# Altium PCB AuxBoard030610.PcbDoc
Units mm, origin at the board's own origin, x right, y up, seen from the top; angles counter-clockwise.
Board outline 193.93 x 90.42 mm, 2 copper layers (Top Layer, Bottom Layer); 177 components, 142 nets, 489 pads, 90 vias.
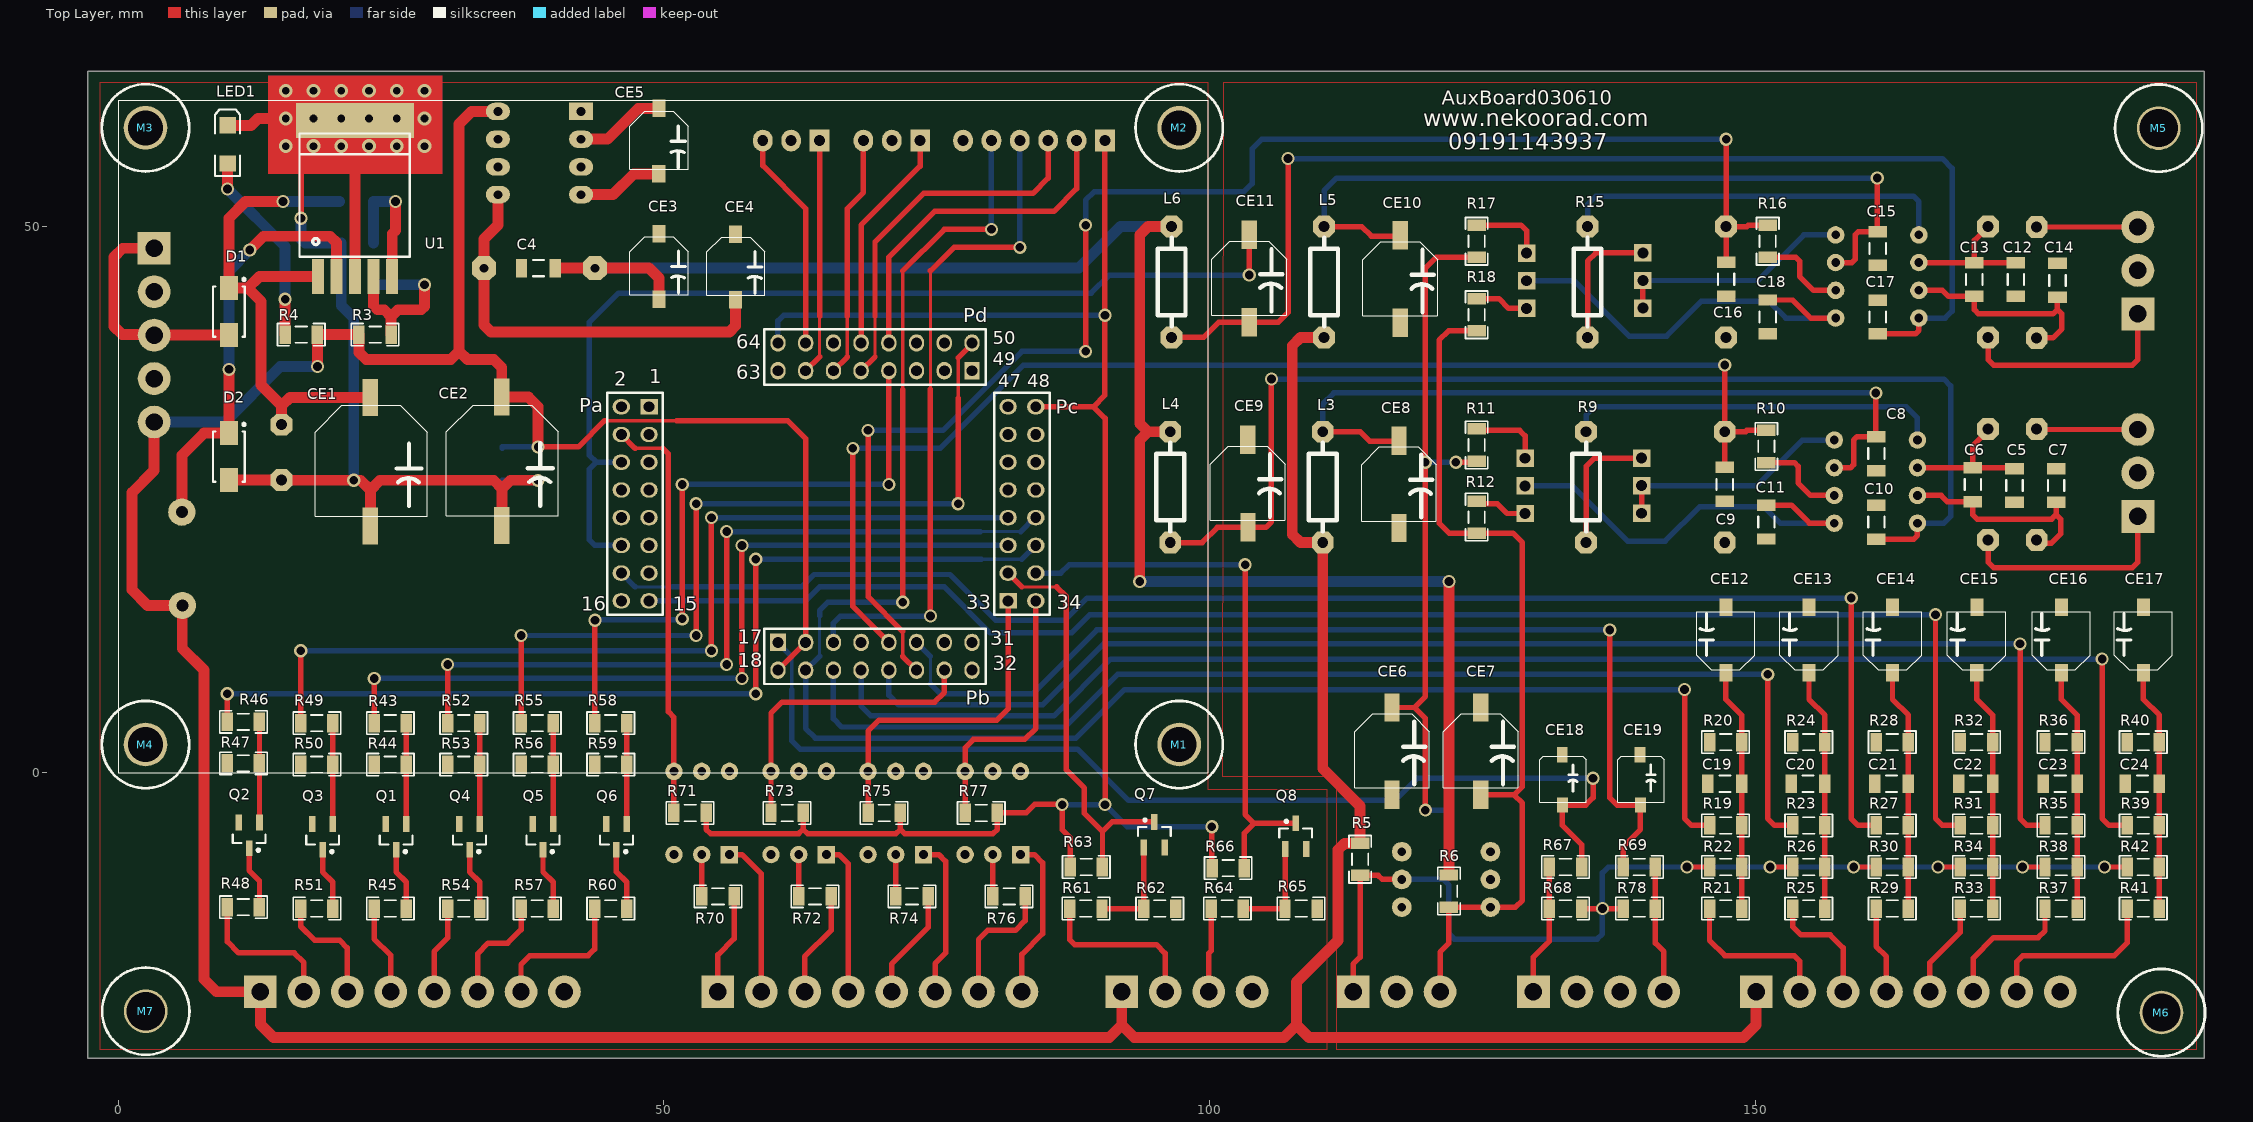
[diagram p0: Top Layer view]
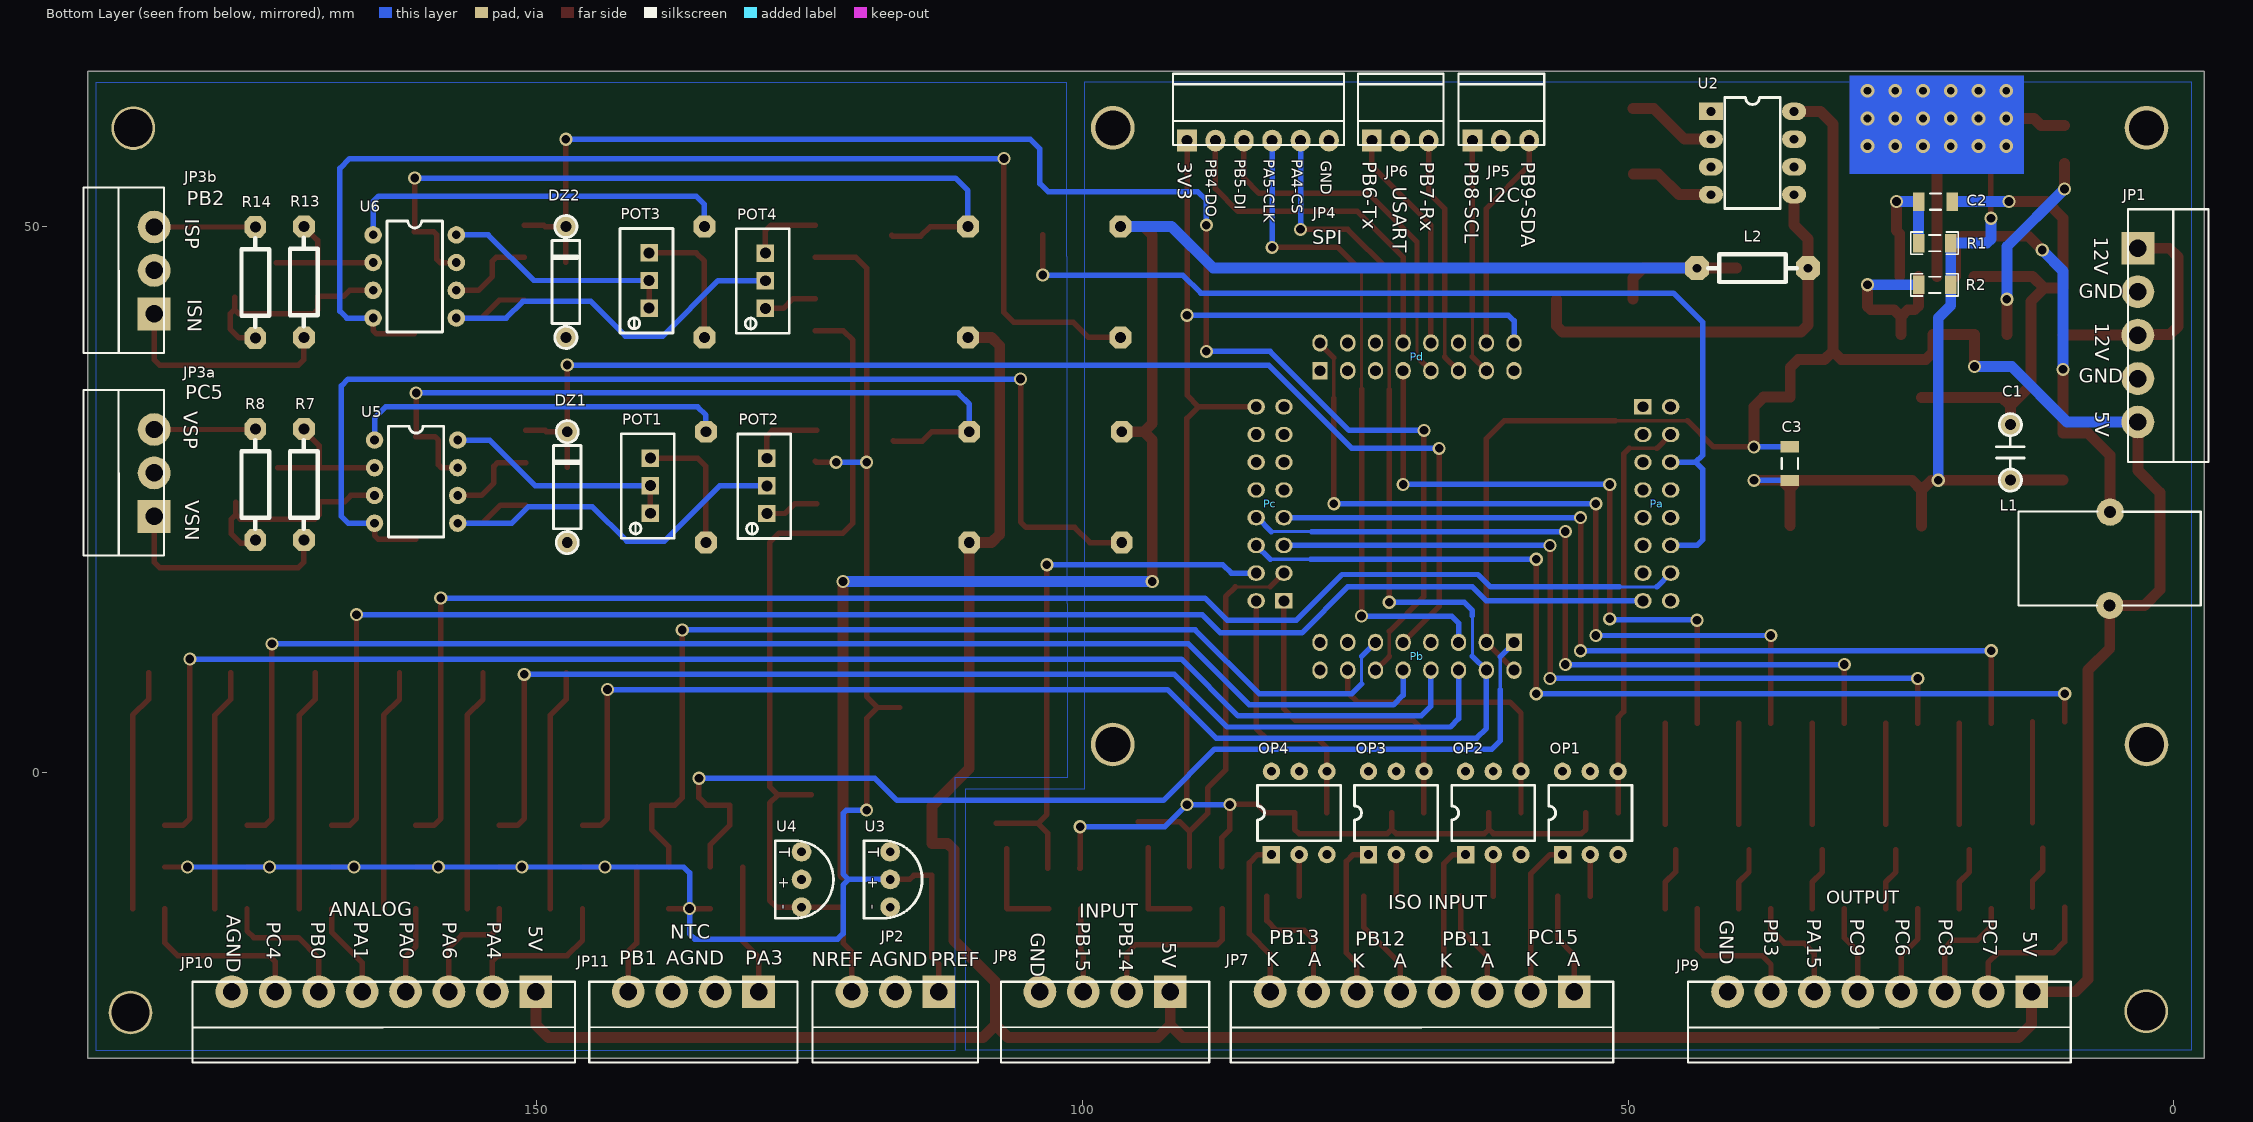
[diagram p1: Bottom Layer view, seen from below]
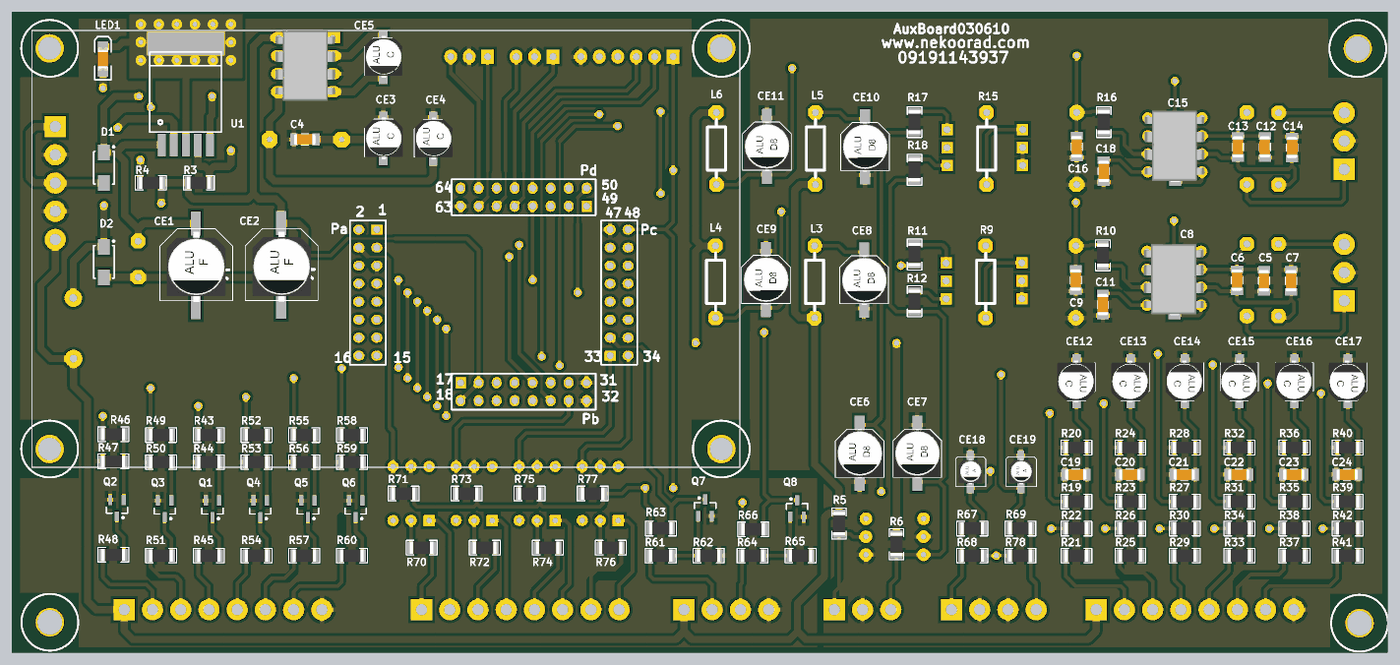
[diagram p2: 3D render of the assembled board from above, using the file's embedded part models]

## Layer stack, top to bottom
Top Solder: solder mask 0.0102, Solder Resist, Dk 3.5
Top Layer: signal copper 0.0356
Dielectric 1: dielectric 0.32, FR-4, Dk 4.8
Bottom Layer: signal copper 0.0356
Bottom Solder: solder mask 0.0102, Solder Resist, Dk 3.5

## Board outline
-2.794,-26.162 -2.794,64.262 191.135,64.262 191.135,-26.162

## Design rules (kind name [scope] priority, off if disabled: settings)
Clearance Clearance_2 [InNamedPolygon('Bottom Layer-GND')] p1: gap=0.254 ignorepadtopadclearanceinfootprint=FALSE except(0: Arc-Hole Track-Hole SMDPad-Hole THPad-Hole Via-Hole Fill-Hole Poly-Hole Region-Hole Text-Hole)
Clearance Clearance_1 [InNamedPolygon('Bottom Layer-GND')] p2: gap=0.254 ignorepadtopadclearanceinfootprint=FALSE except(0: Arc-Hole Track-Hole SMDPad-Hole THPad-Hole Via-Hole Fill-Hole Poly-Hole Region-Hole Text-Hole)
Clearance [All] p3: gap=0.4 ignorepadtopadclearanceinfootprint=FALSE
PlaneClearance [All] p1: clearance=0.5
PlaneConnect [All] p1: planeconnectstyle=Relief reliefexpansion=0.508 reliefentries=4 reliefconductorwidth=0.6 reliefairgap=0.5
PolygonConnect [All] p1: connectstyle=Relief reliefconductorwidth=0.6 reliefentries=4 polygonreliefangle="90 Angle" airgapwidth=0.5
RoutingVias [All] p1: holewidth=0.711 width=1.27 viastyle="Through Hole" minholewidth=0.711 minwidth=1.27 maxholewidth=0.711 maxwidth=1.27
SolderMaskExpansion [All] p1: expansion=0.102 istentingtop=FALSE
Width [All] p1: maxlimit=1 minlimit=0.2 preferedwidth=0.5 minimp=50.000000 maximp=50.000000 favimp=50.000000
28 further rules are at their usual default settings.

## Components (designator, comment, footprint, x,y, rotation, side; value= is the part's Value field where it differs from the comment)
C1 "100N" C2P 14.986,31.886 r270 bottom
C2 "100N" SMD_CAP_1206. 21.848,52.324 r0 bottom
C3 "100N" SMD_CAP_1206. 35.179,28.321 r270 bottom
C4 "100N" SMD_CAP_1206. 38.506,46.228 r180 top
C5 "1N" SMD_CAP_1206. 173.736,26.314 r270 top
C6 "10N" SMD_CAP_1206. 169.926,26.391 r270 top
C7 "1N" SMD_CAP_1206. 177.546,26.314 r90 top
C8 "100N" SMD_CAP_1206. 161.089,29.234 r90 top
C9 "100N" SMD_CAP_1206. 147.193,26.416 r270 top
C10 "100N" SMD_CAP_1206. 161.089,22.96 r90 top
C11 "100N" SMD_CAP_1206. 151.003,22.962 r270 top
C12 "1N" SMD_CAP_1206. 173.863,45.187 r270 top
C13 "10N" SMD_CAP_1206. 170.053,45.187 r270 top
C14 "1N" SMD_CAP_1206. 177.673,45.11 r90 top
C15 "100N" SMD_CAP_1206. 161.216,48.03 r90 top
C16 "100N" SMD_CAP_1206. 147.32,45.212 r270 top
C17 "100N" SMD_CAP_1206. 161.216,41.756 r90 top
C18 "100N" SMD_CAP_1206. 151.13,41.758 r270 top
C19 "10N" SMD_CAP_1206. 147.197,-1.016 r180 top
C20 "10N" SMD_CAP_1206. 154.817,-1.016 r180 top
C21 "10N" SMD_CAP_1206. 162.466,-1.016 r180 top
C22 "10N" SMD_CAP_1206. 170.184,-1.016 r180 top
C23 "10N" SMD_CAP_1206. 177.931,-1.016 r180 top
C24 "10N" SMD_CAP_1206. 185.453,-1.016 r180 top
CE1 "470M/25" CAP-E-6 23.274,24.856 r0 top
CE2 "1000M/16" CAP-E-6 35.306,24.892 r0 top
CE3 "10M/25" CAP-E-3 49.62,44.489 r0 top
CE4 "10M/25" CAP-E-3 56.642,44.45 r0 top
CE5 "10M/25" CAP-E-3 49.605,55.964 r0 top
CE6 "47M" CAP-E-4 116.713,-0.322 r0 top
CE7 "47M" CAP-E-4 124.841,-0.322 r0 top
CE8 "47M" CAP-E-4 117.348,24.13 r0 top
CE9 "47M" CAP-E-4 103.505,24.189 r0 top
CE10 "47M" CAP-E-4 117.475,42.926 r0 top
CE11 "47M" CAP-E-4 103.632,42.985 r0 top
CE12 "10M" CAP-E-3 147.226,14.044 r180 top
CE13 "10M" CAP-E-3 154.846,14.044 r180 top
CE14 "10M" CAP-E-3 162.495,14.044 r180 top
CE15 "10M" CAP-E-3 170.213,14.044 r180 top
CE16 "10M" CAP-E-3 177.96,14.044 r180 top
CE17 "10M" CAP-E-3 185.482,14.044 r180 top
CE18 "1M" CAP-E-2 132.395,-1.739 r0 top
CE19 "1M" CAP-E-2 139.536,-1.739 r0 top
D1 "schottky" SMA-M 10.16,42.241 r270 top
D2 "schottky" SMA-M 10.16,28.956 r270 top
DZ1 "Z" D4P 147.193,21.082 r270 bottom
DZ2 "Z" D4P 147.32,39.878 r270 bottom
JP1 "DC_SUP" "dsip 5 right" 3.302,40.091 r180 bottom
JP2 "Ref" "dsip 3 right" 121.158,-20.066 r270 bottom
JP3a "V/A Signal" "dsip 3 right" 185.039,31.496 r0 bottom
JP3b "V/A Signal" "dsip 3 right" 185.039,50.048 r0 bottom
JP4 "SPI" "SIP 6 Right" 90.41,57.912 r270 bottom
JP5 "I2C" "SIP 3 Right" 64.313,57.785 r270 bottom
JP6 "UART" "SIP 3 Right" 73.533,57.785 r270 bottom
JP7 "ISO DIN" "dsip 8 right" 54.969,-20.091 r270 bottom
JP8 "DIN" "dsip 4 right" 99.933,-20.066 r270 bottom
JP9 "DOUT" "dsip 8 right" 13.059,-20.091 r270 bottom
JP10 "Analog" "dsip 8 right" 150.092,-20.091 r270 bottom
JP11 "NTC" "dsip 4 right" 137.65,-20.066 r270 bottom
L1 "100UH" INDUCTOR-ylw -2.393,23.731 r0 bottom
L2 "100UH" r4p#1 33.528,46.228 r270 bottom
L3 "100UH" r4p#2 110.363,21.082 r180 top
L4 "100UH" r4p#2 96.393,31.242 r0 top
L5 "100UH" r4p#2 110.49,39.878 r180 top
L6 "100UH" r4p#2 96.52,50.038 r0 top
LED1 "Red" LED_SMD_1206 12.254,57.653 r90 top
M1 "Comment" Stud-hole#1 97.212,2.583 r0 top locked value=DNP/MH
M2 "Comment" Stud-hole#1 97.212,59.083 r0 top locked value=DNP/MH
M3 "Comment" Stud-hole#1 2.512,59.083 r0 top locked value=DNP/MH
M4 "Comment" Stud-hole#1 2.512,2.583 r0 top locked value=DNP/MH
M5 "Comment" Stud-hole#2 186.944,59.055 r0 top value=DNP/MH
M6 "Comment" Stud-hole#2 187.198,-21.971 r0 top value=DNP/MH
M7 "Comment" Stud-hole#2 2.54,-21.844 r0 top value=DNP/MH
OP1 "4N28" DIP6 56.007,-7.493 r90 bottom
OP2 "4N28" DIP6 64.897,-7.493 r90 bottom
OP3 "4N28" DIP6 73.787,-7.493 r90 bottom
OP4 "4N28" DIP6 82.677,-7.493 r90 bottom
Pa "Header 8X2" HDR2X8#1 48.641,33.528 r270 bottom locked
Pb "Header 8X2" HDR2X8#2 60.452,11.938 r0 bottom locked
Pc "Header 8X2" HDR2X8#1 81.534,15.748 r90 bottom locked
Pd "Header 8X2" HDR2X8#1 78.232,36.83 r180 bottom locked
POT1 "XX" "pot multi turn" 139.573,23.769 r180 bottom
POT2 "10K" "pot multi turn" 128.905,23.749 r180 bottom
POT3 "XX" "pot multi turn" 139.7,42.565 r180 bottom
POT4 "10K" "pot multi turn" 129.032,42.545 r180 bottom
Q1 "2N2222" 2N2222 25.566,-4.174 r180 top
Q2 "2N2222" 2N2222 12.104,-4.047 r180 top
Q3 "2N2222" 2N2222 18.835,-4.174 r180 top
Q4 "2N2222" 2N2222 32.297,-4.174 r180 top
Q5 "2N2222" 2N2222 39.028,-4.174 r180 top
Q6 "2N2222" 2N2222 45.759,-4.174 r180 top
Q7 "2N2222" 2N2222 94.83,-7.383 r0 top
Q8 "2N2222" 2N2222 107.784,-7.51 r0 top
R1 "10K%" RES_1206 21.886,47.633 r180 bottom
R2 "2K2%" RES_1206 21.886,43.823 r180 bottom
R3 "47K%" RES_1206 23.58,39.251 r0 top
R4 "4K7%" RES_1206 16.748,41.013 r180 top
R5 "270R" RES_1206 114.673,-7.887 r90 top
R6 "270R" RES_1206 122.801,-10.808 r90 top
R7 "5K%" R4P 171.323,21.336 r0 bottom
R8 "5K%" R4P 175.768,31.496 r180 bottom
R9 "XX" R4P 134.493,31.242 r0 top
R10 "1K%" RES_1206 150.122,29.858 r270 top
R11 "XX" RES_1206 125.341,30.057 r90 top
R12 "XX" RES_1206 123.579,23.381 r270 top
R13 "5K%" R4P 171.323,39.878 r0 bottom
R14 "5K%" R4P 175.768,49.997 r180 bottom
R15 "XX" R4P 134.62,50.038 r0 top
R16 "1K%" RES_1206 150.249,48.654 r270 top
R17 "XX" RES_1206 125.341,48.726 r90 top
R18 "XX" RES_1206 123.579,41.923 r270 top
R19 "1K%" RES_1206 147.307,-5.707 r0 top
R20 "ND" RES_1206 147.307,1.913 r0 top
R21 "1K%" RES_1206 147.235,-11.565 r180 top
R22 "ND" RES_1206 147.307,-9.517 r0 top
R23 "1K%" RES_1206 154.927,-5.707 r0 top
R24 "ND" RES_1206 154.927,1.913 r0 top
R25 "1K%" RES_1206 154.855,-11.565 r180 top
R26 "ND" RES_1206 154.927,-9.517 r0 top
R27 "1K%" RES_1206 162.576,-5.707 r0 top
R28 "ND" RES_1206 162.576,1.913 r0 top
R29 "1K%" RES_1206 162.504,-11.565 r180 top
R30 "ND" RES_1206 162.576,-9.517 r0 top
R31 "1K%" RES_1206 170.294,-5.707 r0 top
R32 "ND" RES_1206 170.294,1.913 r0 top
R33 "1K%" RES_1206 170.222,-11.565 r180 top
R34 "ND" RES_1206 170.294,-9.517 r0 top
R35 "1K%" RES_1206 178.041,-5.707 r0 top
R36 "ND" RES_1206 178.041,1.913 r0 top
R37 "1K%" RES_1206 177.969,-11.565 r180 top
R38 "ND" RES_1206 178.041,-9.517 r0 top
R39 "1K%" RES_1206 185.563,-5.707 r0 top
R40 "ND" RES_1206 185.563,1.913 r0 top
R41 "1K%" RES_1206 185.491,-11.565 r180 top
R42 "ND" RES_1206 185.563,-9.517 r0 top
R43 "10K" RES_1206 24.977,3.662 r0 top
R44 "4K7" RES_1206 24.905,1.614 r180 top
R45 "ND" RES_1206 24.905,-11.565 r180 top
R46 "10K" RES_1206 11.515,3.789 r0 top
R47 "4K7" RES_1206 11.443,1.741 r180 top
R48 "ND" RES_1206 11.443,-11.438 r180 top
R49 "10K" RES_1206 18.246,3.662 r0 top
R50 "4K7" RES_1206 18.174,1.614 r180 top
R51 "ND" RES_1206 18.174,-11.565 r180 top
R52 "10K" RES_1206 31.708,3.662 r0 top
R53 "4K7" RES_1206 31.636,1.614 r180 top
R54 "ND" RES_1206 31.636,-11.565 r180 top
R55 "10K" RES_1206 38.439,3.662 r0 top
R56 "4K7" RES_1206 38.367,1.614 r180 top
R57 "ND" RES_1206 38.367,-11.565 r180 top
R58 "10K" RES_1206 45.17,3.662 r0 top
R59 "4K7" RES_1206 45.098,1.614 r180 top
R60 "ND" RES_1206 45.098,-11.565 r180 top
R61 "10K" RES_1206 88.702,-13.327 r0 top
R62 "4K7" RES_1206 95.462,-13.327 r0 top
R63 "10K" RES_1206 88.731,-9.517 r0 top
R64 "10K" RES_1206 101.656,-13.327 r0 top
R65 "4K7" RES_1206 108.416,-13.327 r0 top
R66 "10K" RES_1206 101.735,-9.63 r0 top
R67 "10K" RES_1206 132.644,-9.517 r0 top
R68 "5K" RES_1206 132.572,-11.565 r180 top
R69 "10K" RES_1206 139.332,-7.755 r180 top
R70 "1K%" RES_1206 54.92,-10.436 r180 top
R71 "10K%" RES_1206 52.438,-4.564 r0 top
R72 "1K%" RES_1206 63.81,-10.436 r180 top
R73 "10K%" RES_1206 61.328,-4.564 r0 top
R74 "1K%" RES_1206 72.7,-10.436 r180 top
R75 "10K%" RES_1206 70.218,-4.564 r0 top
R76 "1K%" RES_1206 81.59,-10.436 r180 top
R77 "10K%" RES_1206 79.108,-4.564 r0 top
R78 "5K" RES_1206 139.404,-13.327 r0 top
U1 "LM2576T-ADJ" D2PACK_TO263-5 21.717,50.165 r0 top
U2 "ICL7662" DIP8#1 42.418,60.579 r180 bottom
U3 "LM336-2V5" lm336 117.602,-12.319 r180 bottom
U4 "LM336-2V5" lm336 125.73,-12.319 r180 bottom
U5 "AD620" DIP8#2 164.846,30.48 r180 bottom
U6 "AD620" DIP8#2 164.973,49.276 r180 bottom

## Footprints (in the part's own frame and the unit in brackets; to place one, negate y for a bottom-side part, rotate by r counter-clockwise, add the part's x,y. Pads: shape width x height; smd on the part's side, far side on the other; paste and mask are expansions set on the pad)
2N2222 [mm] "SOT_23"
  rect 0.6x1.45 smd: 1(-0.85,0.525) 2(1.05,0.525) 3(0.1,2.875)
  silkscreen extent -1.4,1.6 1.6,3.17, body extent -1.4,1 1.6,2.4, height 1.1
C2P [mm]
  oct 2x2 hole 1: 1(0,0) 2(5.08,0)
  silkscreen extent -1.02,-1.27 6.1,1.27
CAP-E-2 [mm] "1u-50v"
  rect 1x1.4 smd: 1(-0.09,3.39) 2(-0.075,-1.22)
  silkscreen extent -2.17,-0.98 2.11,3.25, body extent -1.68,-0.65 1.62,2.95, height 5.4
CAP-E-3 [mm] "22u-35v"
  rect 1.2x1.6 smd: 1(-0.065,4.9) 2(-0.075,-1.1)
  silkscreen extent -2.72,-0.69 2.62,4.62, body extent -2.64,-1.03 2.66,4.87, height 5.41
CAP-E-4 [mm] "(100u-35v)(47u-16v)(220u-16v)(100u-16v)(10u-50v)"
  rect 1.4x2.6 smd: 1(-0.005,6.3) 2(0,-1.71)
  silkscreen extent -3.43,-1.07 3.43,5.71, body extent -3.27,-1.22 3.33,5.78, height 7.7
CAP-E-6 [mm] "(220u-35v)(470u-25v)"
  rect 1.4x3.4 smd: 1(-0.16,9.535) 2(-0.16,-2.25)
  silkscreen extent -5.22,-1.35 5.03,8.79, body extent -4.24,-1.54 4.06,8.36, height 10.2
D2PACK_TO263-5 [mm]
  rect 1.1x3.2 smd: 1(-3.4,-4.7) 2(-1.7,-4.7) 3(0,-4.7) 4(1.7,-4.7) 5(3.4,-4.7)
  rect 10.8x3.2 smd: 3(0,9.6)
  silkscreen extent -5.1,-2.9 5,8.4, body extent -5.1,-4.62 5.06,9.62, height 4.87
D4P [mm]
  oct 2x2 hole 1: 1(0,0) 2(-10.16,0)
  silkscreen extent -11.18,-1.27 1.02,1.27
DIP6 [mm]
  rect 1.6x1.6 hole 0.8: 1(0,0)
  round 1.6 hole 0.8: 2(0,-2.54) 3(0,-5.08) 4(7.62,-5.08) 5(7.62,-2.54) 6(7.62,0)
  silkscreen extent 1.27,-6.35 6.35,1.27
DIP8#1 [mm]
  rect 2.2x1.6 hole 0.8: 1(0,0)
  oval 2.2x1.6 hole 0.8: 2(0,-2.54) 3(0,-5.08) 4(0,-7.62) 5(7.62,-7.62) 6(7.62,-5.08) 7(7.62,-2.54) 8(7.62,0)
  silkscreen extent 1.27,-8.89 6.35,1.27, body extent -1.42,-8.88 9.14,1.02, height 3.75
DIP8#2 [mm]
  round 1.6 hole 0.8: 1(0,0) 2(0,-2.54) 3(0,-5.08) 4(0,-7.62) 5(7.62,-7.62) 6(7.62,-5.08) 7(7.62,-2.54) 8(7.62,0)
  silkscreen extent 1.27,-8.89 6.35,1.27, body extent -1.42,-8.88 9.14,1.02, height 3.75
"dsip 3 right" [mm]
  rect 3x3 hole 1.6: 1(0,8.011)
  round 3 hole 1.6: 2(0,4.031) 3(0,0.051)
  silkscreen extent -0.91,-3.56 6.48,11.59
"dsip 4 right" [mm]
  rect 3x3 hole 1.6: 1(0,7.985)
  round 3 hole 1.6: 2(0,4.005) 3(0,0.025) 4(0,-3.955)
  silkscreen extent -0.91,-7.52 6.48,11.56
"dsip 5 right" [mm]
  rect 3x3 hole 1.6: 1(0,7.96)
  round 3 hole 1.6: 2(0,3.98) 3(0,0) 4(0,-3.98) 5(0,-7.96)
  silkscreen extent -0.91,-11.63 6.48,11.53
"dsip 8 right" [mm]
  rect 3x3 hole 1.6: 1(-0.025,0.025)
  round 3 hole 1.6: 2(-0.025,-3.955) 3(-0.025,-7.935) 4(-0.025,-11.915) 5(-0.025,-15.895) 6(-0.025,-19.875) 7(-0.025,-23.855) 8(-0.025,-27.835)
  silkscreen extent -0.94,-31.45 6.45,3.6
HDR2X8#1 [mm] "Connector; Header; 8x2 Position"
  rect 1.4x1.6 hole 1: 1(0,0)
  oval 1.4x1.6 hole 1: 2(0,2.54) 3(2.54,0) 4(2.54,2.54) 5(5.08,0) 6(5.08,2.54) 7(7.62,0) 8(7.62,2.54) 9(10.16,0) 10(10.16,2.54) 11(12.7,0) 12(12.7,2.54) 13(15.24,0) 14(15.24,2.54) 15(17.78,0) 16(17.78,2.54)
HDR2X8#2 [mm] "Connector; Header; 8x2 Position"
  rect 1.5x1.6 hole 1: 1(0,0)
  oval 1.4x1.6 hole 1: 2(0,2.54) 3(2.54,0) 4(2.54,2.54) 5(5.08,0) 6(5.08,2.54) 7(7.62,0) 8(7.62,2.54) 9(10.16,0) 10(10.16,2.54) 11(12.7,0) 12(12.7,2.54) 13(15.24,0) 14(15.24,2.54) 15(17.78,0) 16(17.78,2.54)
INDUCTOR-ylw [mm]
  round 2.5 hole 1.1: 1(8.275,8.405) 2(8.235,-0.145)
  silkscreen extent -0.07,-0.21 16.63,8.42
LED_SMD_1206 [mm] "SMD"
  rect 1.5x1.5 smd: 1(-1.844,2.221) 2(1.656,2.221)
  silkscreen extent -2.99,1.07 3.11,3.37, body extent -1.74,1.46 1.56,2.91, height 1.36
lm336 [mm]
  round 1.8 hole 0.8: 1(0,0) 2(0,2.54) 3(0,5.08)
  silkscreen extent -2.41,-1.02 2.92,6.1
"pot multi turn" [mm]
  rect 1.6x1.6 hole 1: 1(0,5.06) 2(0,0) 3(0,2.53)
  silkscreen extent -2.67,-2.29 2.18,7.29
r4p#1 [mm]
  oct 2.2x2.2 hole 0.8: 1(0,0) 2(0,-10.16)
  silkscreen extent -1.27,-9.14 1.27,-1.02
r4p#2 [mm]
  oct 2x2 hole 1: 1(0,0) 2(0,-10.16)
  silkscreen extent -1.27,-9.14 1.27,-1.02
R4P [mm]
  oct 2x2 hole 1: 1(0,0) 2(0,-10.16)
  silkscreen extent -1.27,-9.14 1.27,-1.02
RES_1206 [mm] "SMD"
  rect 1.05x1.7 smd: 1(-1.511,0.881) 2(1.439,0.881)
  silkscreen extent -2.21,-0.14 2.14,1.91, body extent -1.69,0.03 1.61,1.73, height 0.94
"SIP 3 Right" [mm]
  rect 2x1.8 hole 1: 1(-0.127,0.051)
  oval 2x1.8 hole 1: 2(-0.127,2.651) 3(-0.127,5.251)
  silkscreen extent -6.25,-1.22 0.28,6.63
"SIP 6 Right" [mm]
  rect 2x1.8 hole 1: 1(0,0)
  oval 2x1.8 hole 1: 2(0,2.6) 3(0,5.2) 4(0,7.8) 5(0,10.4) 6(0,13)
  silkscreen extent -6.12,-1.3 0.41,14.38
SMA-M [mm] "Molded Diode, 2-Leads, Body 4.30x2.70mm, IPC Low Density"
  rect 2.2x1.65 smd: 1(2.15,0) 2(-2.15,0)
  silkscreen extent -3.07,-1.45 2.3,1.5, body extent -2.3,-1.45 2.3,1.45, height 2.44
SMD_CAP_1206. [mm]
  rect 1.05x1.7 smd: 1(-1.549,0) 2(1.549,0)
  silkscreen extent -0.5,-0.75 0.5,0.75, body extent -1.52,-0.77 1.53,0.75, height 0.75
Stud-hole#1 [mm]
  round 4 hole 3.2: 1(0,0)
  silkscreen extent -4,-4 4,4
Stud-hole#2 [mm]
  round 4 hole 3.5: 1(0,0)
  silkscreen extent -4,-4 4,4

## Part data
C1 C2 C3 C4 C5 C6 C7 C8 C9 C10 C11 C12 C13 C14 C15 C16 C17 C18 C19 C20 C21 C22 C23 C24: library part C
CE1 CE2 CE3 CE4 CE5 CE6 CE7 CE8 CE9 CE10 CE11 CE12 CE13 CE14 CE15 CE16 CE17 CE18 CE19: library part E
D1 D2: library part Diode, "Default Diode", Code_JEDEC=DO-214-AB, LatestRevisionDate=17-Jul-2002, LatestRevisionNote="Re-released for DXP Platform.", PackageDescription="DO-214-AB/SMC; 2 C-Bend Leads; Body 7.9 x 5.9 mm, inc. leads (LxW)", PackageReference=SMC, PackageVersion=Sep-1996, Published=8-Jun-2000, Publisher="Altium Limited"
JP1: library part "HEADER 5"
JP2 JP3a JP3b JP5 JP6: library part "Header 3", "Header, 3-Pin", LatestRevisionDate=17-Jul-2002, LatestRevisionNote="Re-released for DXP Platform.", Publisher="Altium Limited"
JP4: library part "HEADER 6"
JP7 JP9 JP10: library part "HEADER 8"
JP8 JP11: library part "Header 4", "Header, 4-Pin", LatestRevisionDate=17-Jul-2002, LatestRevisionNote="Re-released for DXP Platform.", Publisher="Altium Limited"
L1 L2 L3 L4 L5 L6: library part "INDUCTOR IRON"
LED1: library part LED, "LED", Adding Date=1387/12/22, Color=Red, Designer="Saeid Jorablo", Organazation=ControTec, Size="SMD 1206"
M1 M2 M3 M4 M5 M6 M7: library part SCMH_M1P6, "SCREW mouting, M1.6, 1.6mm diameter and 3.2mm PanHead", ASSEMBLY=DNP
OP1 OP2 OP3 OP4: library part OPTODIP6
Pa Pb Pc Pd: "Header, 8-Pin, Dual row", LatestRevisionDate=17-Jul-2002, LatestRevisionNote="Re-released for DXP Platform.", Publisher="Altium Limited"
POT1 POT2 POT3 POT4: library part POT2
Q1 Q2 Q3 Q4 Q5 Q6 Q7 Q8: library part 1FW, "NPN", ComponentLink1Description=Datasheet, ComponentLink1URL=http://www.farnell.com/datasheets/1685012.pdf, DatasheetVersion=1997, LatestRevisionDate=15-Jan-2003, LatestRevisionNote="PCB Footprint 'BCY-W3/D4.7' replaced", PackageDescription="TO, Flat Index; 3 In-Line, Axial Leads; Body Dia. 4.5mm; Leads 0.51 x 0.48 mm (max)", PackageReference=TO-92A, PackageVersion=Sep-1998, Published=8-Jun-2000, Publisher="Altium Limited"
R1 R2 R3 R4 R5 R6 R7 R8 R9 R10 R11 R12 R13 R14 R15 R16 R17 R18 R19 R20 R21 R22 R23 R24 R25 R26 R27 R28 R29 R30 R31 R32 R33 R34 R35 R36 R37 R38 R39 R40 R41 R42 R43 R44 R45 R46 R47 R48 R49 R50 R51 R52 R53 R54 R55 R56 R57 R58 R59 R60 R61 R62 R63 R64 R65 R66 R67 R68 R69 R70 R71 R72 R73 R74 R75 R76 R77 R78: library part R
U1: library part LM2576
U3 U4: library part LM336

## Via types
v1: diameter 1.2, hole 0.8, Top Layer to Bottom Layer, 72 vias
v2: diameter 1.27, hole 0.711, Top Layer to Bottom Layer, 18 vias

## Nets (pads, with @x,y where several pads share a name; then routed paths per layer and width w, separated by ;. In a path a pad name is that pad's centre, name@x,y a point inside that pad or via, vN(x,y) a via of type N, cw(c..) or ccw(c..) an arc to the next point about the centre after c; other vN are vias at no path point)
3V3: JP4.1 Pc.16 Pd.16 R63.1 R66.1 R71.2 R73.2 R75.2 R77.2 | length 163.6
  Top Layer w0.5: R71.2 53.877,-5.178 54.287,-5.588 62.357,-5.588 62.767,-5.178 ; R73.2 62.767,-5.178 ; R75.2 71.657,-5.178 ; Pc.16 89.355,33.528 ; R63.1 87.22,-5.94 86.487,-5.207 v1(86.487,-2.921) 86.438,-2.872 83.996,-2.872 83.185,-3.683 R77.2 80.547,-5.178 80.137,-5.588 72.067,-5.588 71.657,-5.178 ; JP4.1 90.41,34.583 89.355,33.528 ; v1(90.424,-2.921) 90.424,32.459 89.355,33.528 ; v1(100.203,-4.953) 100.214,-4.964 100.214,-8.738 R66.1 ; 62.767,-5.178 63.177,-5.588 71.247,-5.588 71.657,-5.178
  Bottom Layer w0.5: Pd.16 60.452,41.402 60.96,41.91 v1(90.424,41.91) ; v1(86.487,-2.921) v1(90.424,-2.921) 92.456,-4.953 v1(100.203,-4.953)
5VN: C4.1 CE3.2 L2.2 L4.1 L6.1 R6.2 | length 159.1
  Top Layer w1: C4.1 L2.2 48.641,46.228 49.545,45.324 CE3.2 ; v1(93.599,17.526) 93.599,30.48 94.361,31.242 ; L4.1 94.361,31.242 ; L6.1 94.361,50.038 93.599,49.276 93.599,32.004 94.361,31.242 ; R6.2 v1(121.92,17.526)
  Bottom Layer w1: L2.2 88.011,46.228 91.821,50.038 L6.1 ; v1(93.599,17.526) v1(121.92,17.526)
5VP: C3.1 CE2.1 JP1.5 JP8.1 JP9.1 JP10.1 L1.1 L3.1 L5.1 Pb.2 Pb.3 R3.1 R4.1 R5.2 U2.8 | length 410.2
  Top Layer w0.3: 44.577,32.258 51.181,32.258
  Top Layer w0.5: v1(38.481,29.845) 42.164,29.845 44.577,32.258 ; 51.181,32.258 61.341,32.258 62.992,30.607 Pb.3 Pb.2
  Top Layer w1: JP1.5 3.302,27.686 1.27,25.654 1.27,16.764 2.708,15.326 L1.1 5.882,11.39 7.874,9.398 7.874,-18.923 9.017,-20.066 JP9.1 13.034,-23.067 14.224,-24.257 90.805,-24.257 91.948,-23.114 ; v1(18.259,37.211) R4.1 R3.1 22.069,38.51 22.733,37.846 30.48,37.846 31.242,38.608 ; U2.8 32.385,60.579 31.242,59.436 31.242,38.608 ; v1(38.481,29.845) 38.481,33.528 37.582,34.427 CE2.1 35.146,37.117 34.417,37.846 32.004,37.846 31.242,38.608 ; JP8.1 91.948,-23.114 ; L5.1 108.331,39.878 107.569,39.116 107.569,21.844 108.331,21.082 L3.1 110.363,0.381 113.792,-3.048 R5.2 113.767,-6.473 112.346,-6.473 111.76,-7.059 111.76,-15.367 107.95,-19.177 107.95,-23.114 ; JP10.1 150.067,-23.114 148.924,-24.257 109.093,-24.257 107.95,-23.114 ; 91.948,-23.114 93.091,-24.257 106.807,-24.257 107.95,-23.114
  Bottom Layer w0.5: C3.1@35.179,29.743 C3.1@35.204,29.718 ; C3.1@35.204,29.845 v1(38.481,29.845)
  Bottom Layer w1: JP1.5@3.429,32.258 JP1.5 9.779,32.131 14.859,37.211 v1(18.259,37.211)
11V: C1.1 C2.1 CE1.1 D1.2 U1.1 | length 48
  Top Layer w1: C1.1 14.986,33.629 ; v1(15.113,52.324) 11.684,52.324 10.16,50.8 D1.2 11.879,44.391 ; U1.1 12.953,45.465 11.879,44.391 ; CE1.1 15.748,34.391 14.986,33.629 ; 11.879,44.391 13.081,43.189 13.081,35.534 14.986,33.629
  Bottom Layer w1: v1(15.113,52.324) C2.1
12V: D1.1 JP1.1 JP1.3 | length 21.2
  Top Layer w1: JP1.1 0.426,48.051 -0.381,47.244 -0.381,40.894 0.381,40.132 3.261,40.132 JP1.3 D1.1
+INa: C6.2 C7.1 R8.2 U5.3 | length 20.2
  Top Layer w0.5: U5.3 167.005,25.4 167.564,24.841 C6.2 169.926,23.622 170.307,23.241 177.136,23.241 177.546,23.651 ; R8.2@175.641,21.041 177.124,21.041 177.956,21.873 177.956,23.241 177.546,23.651 ; C7.1 177.546,23.651
+INb: C13.2 C14.1 R14.2 U6.3 | length 20.2
  Top Layer w0.5: U6.3 167.132,44.196 167.691,43.637 C13.2 170.053,42.418 170.434,42.037 177.263,42.037 177.673,42.447 ; R14.2 177.251,39.837 178.083,40.669 178.083,42.037 177.673,42.447 ; C14.1 177.673,42.447
+VSa: C8.2 CE8.1 L3.2 U5.7 | length 71.4
  Top Layer w0.5: L3.2 113.792,31.242 114.681,30.353 117.266,30.353 CE8.1 ; U5.7 158.711,27.94 159.004,28.233 159.004,30.48 159.307,30.783 C8.2 161.036,30.836 v1(161.036,34.798)
  Bottom Layer w0.5: L3.2 110.363,33.782 111.379,34.798 v1(161.036,34.798)
+VSb: C15.2 CE10.1 L5.2 U6.7 | length 73.1
  Top Layer w0.5: L5.2 113.919,50.038 114.808,49.149 117.393,49.149 CE10.1 ; U6.7 158.838,46.736 159.131,47.029 159.131,49.276 159.434,49.579 C15.2 161.163,49.632 v1(161.163,54.483)
  Bottom Layer w0.5: L5.2 110.491,53.341 111.633,54.483 v1(161.163,54.483)
-INa: C5.1 C6.1 R7.2 U5.2 | length 12.7
  Top Layer w0.5: U5.2 C6.1 ; R7.2@171.196,31.242 169.926,29.972 C6.1 ; C5.1@173.736,27.94 C6.1
-INb: C12.1 C13.1 R13.2 U6.2 | length 12.7
  Top Layer w0.5: U6.2 C13.1 ; R13.2 170.053,48.768 C13.1 ; C12.1 C13.1
-VSa: C10.1 CE9.2 L4.2 U5.4 | length 105.9
  Top Layer w0.5: L4.2 99.314,21.082 100.711,22.479 CE9.2 105.156,22.479 105.664,22.987 v1(105.664,36.068) ; C10.1 164.517,21.411 164.846,21.739 U5.4
  Bottom Layer w0.5: v1(105.664,36.068) 167.259,36.068 167.894,35.433 167.894,23.495 167.259,22.86 U5.4
-VSb: C17.1 CE11.2 L6.2 U6.4 | length 108.3
  Top Layer w0.5: L6.2 99.441,39.878 100.838,41.275 CE11.2 106.299,41.275 107.188,42.164 v1(107.188,56.261) ; C17.1 164.644,40.207 164.973,40.535 U6.4
  Bottom Layer w0.5: v1(107.188,56.261) 167.132,56.261 168.021,55.372 168.021,42.291 167.386,41.656 U6.4
ADC1-EXTI15: OP1.4 Pa.4 R71.1 | length 38.2
  Top Layer w0.3: 47.371,29.718 49.911,29.718
  Top Layer w0.5: Pa.4 47.371,29.718 ; 49.911,29.718 50.419,29.21 50.419,5.588 50.927,5.08 OP1.4 R71.1
ADC1-IN1: Pa.14 R27.1 | length 139
  Top Layer w0.5: v1(158.779,16.002) 158.779,-4.191 159.414,-4.826 R27.1
  Bottom Layer w0.3: 47.371,17.018 50.8,17.018
  Bottom Layer w0.5: Pa.14 47.371,17.018 ; 50.8,17.018 62.611,17.018 63.754,18.161 76.2,18.161 80.391,13.97 86.741,13.97 88.773,16.002 v1@158.75,16.002
ADC1-IN2: Pa.15 R31.1 | length 142
  Top Layer w0.5: v1(166.497,14.478) 166.497,-4.191 167.132,-4.826 R31.1
  Bottom Layer w0.5: Pa.15 62.992,15.748 64.262,17.018 75.692,17.018 79.894,12.816 87.365,12.816 89.027,14.478 v1(166.497,14.478)
ADC1-IN4: CE18.2 Pb.1 R67.2 | length 97.3
  Top Layer w0.5: R67.2 134.083,-6.575 132.32,-4.812 CE18.2 134.455,-2.959 135.128,-2.286 v1(135.128,-0.508)
  Bottom Layer w0.3: 61.722,7.62 61.722,10.618
  Bottom Layer w0.5: Pb.1@60.452,11.888 61.722,10.618 ; 61.722,7.62 61.722,2.921 62.484,2.159 87.884,2.159 92.583,-2.54 116.967,-2.54 118.999,-0.508 v1(135.128,-0.508)
ADC1-IN11: Pb.10 R35.1 | length 127.2
  Top Layer w0.5: v1(174.244,11.811) 174.244,-4.191 174.879,-4.826 R35.1
  Bottom Layer w0.5: Pb.10 70.612,7.112 71.501,6.223 84.709,6.223 90.297,11.811 v1(174.244,11.811)
ADC1-IN12: CE19.2 Pb.11 R69.2 | length 94.1
  Top Layer w0.5: v1(136.653,13.081) 136.653,-2.286 137.326,-2.959 CE19.2 139.461,-5.192 137.893,-6.76 R69.2
  Bottom Layer w0.3: 74.422,8.128 74.422,10.668
  Bottom Layer w0.5: Pb.11 74.422,10.668 ; 74.422,8.128 75.311,7.239 83.82,7.239 89.662,13.081 v1(136.653,13.081)
ADC2-EXTI11: OP2.4 Pb.14 R73.1 | length 27.8
  Top Layer w0.5: R73.1 OP2.4 59.817,5.461 60.833,6.477 74.803,6.477 75.692,7.366 Pb.14
ADC2-IN5: Pb.8 R39.1 | length 136.7
  Top Layer w0.5: v1(181.766,10.414) 181.766,-4.191 182.401,-4.826 R39.1
  Bottom Layer w0.5: Pb.8 68.072,6.096 68.961,5.207 85.725,5.207 90.932,10.414 v1(181.766,10.414)
ADC2-IN11: C9.1 DZ1.2 Pb.9 R10.1 | length 115.4
  Top Layer w0.5: v1(67.31,29.718) 67.31,15.24 Pb.9 ; C9.1 DZ1.2 ; v1@147.193,37.338 DZ1.2 ; R10.1 149.225,31.369 149.098,31.242 DZ1.2
  Bottom Layer w0.5: v1(67.31,29.718) 75.311,29.718 82.942,37.349 v1(147.193,37.349)
ADC2-IN12: C16.1 DZ2.2 Pb.12 R16.1 | length 138.6
  Top Layer w0.3: 71.882,10.668 71.882,12.954
  Top Layer w0.5: v1(68.707,31.369) 68.707,16.129 71.882,12.954 ; 71.882,10.668 Pb.12 ; v1(88.646,38.608) v1(88.646,50.165) ; C16.1 DZ2.2 ; v1(147.32,58.039) DZ2.2 ; R16.1 149.352,50.165 149.225,50.038 DZ2.2
  Bottom Layer w0.5: v1(68.707,31.369) 75.565,31.369 82.804,38.608 v1(88.646,38.608) ; v1(88.646,50.165) 88.646,52.451 89.408,53.213 103.124,53.213 103.886,53.975 103.886,57.15 104.775,58.039 v1(147.32,58.039)
AGND: C5.2 C7.2 C8.1 C9.2 C10.2 C11.2 C12.2 C14.2 C15.1 C16.2 C17.2 C18.2 C19.2 C20.2 C21.2 C22.2 C23.2 C24.2 CE6.2 CE7.1 CE8.2 CE9.1 CE10.2 CE11.1 CE12.2 CE13.2 CE14.2 CE15.2 CE16.2 CE17.2 CE18.1 CE19.1 DZ1.1 DZ2.1 JP2.2 JP3a.2 JP3b.2 JP10.8 JP11.2 JP11.3 Pa.6 Pa.12 R20.1 R24.1 R28.1 R32.1 R36.1 R40.1 U3.1 U4.2 | length 91.8
  Top Layer w0.5: v1(103.627,45.593) CE11.1
  Bottom Layer w0.5: Pa.12 43.688,20.828 43.18,21.336 43.18,27.813 43.815,28.448 ; Pa.6 43.815,28.448 ; v1@103.632,45.593 90.805,45.593 89.154,43.942 45.847,43.942 43.18,41.275 43.18,29.083 43.815,28.448
AIO1: JP10.2 R21.2 | length 14.8
  Top Layer w0.5: R21.2 145.796,-15.367 147.193,-16.764 153.543,-16.764 154.047,-17.268 JP10.2
AIO2: JP10.3 R25.2 | length 11.1
  Top Layer w0.5: R25.2 153.416,-14.097 154.178,-14.859 156.845,-14.859 158.027,-16.041 JP10.3
AIO3: JP10.4 R29.2 | length 8
  Top Layer w0.5: R29.2 161.065,-15.904 162.007,-16.846 JP10.4
AIO4: JP10.5 R33.2 | length 8.8
  Top Layer w0.5: JP10.5 165.987,-17.401 168.783,-14.605 R33.2
AIO5: JP10.6 R37.2 | length 12.7
  Top Layer w0.5: JP10.6 169.967,-16.977 171.831,-15.113 175.895,-15.113 176.53,-14.478 R37.2
AIO6: JP10.7 R41.2 | length 16.7
  Top Layer w0.5: JP10.7 173.947,-17.315 174.498,-16.764 182.88,-16.764 184.052,-15.592 R41.2
BKL: Pa.2
Buzzer: Pb.13
DAC1-OUT1: JP4.5 Pb.4 R19.1 | length 164.5
  Top Layer w0.3: 71.882,35.083 71.882,45.974
  Top Layer w0.5: v1(71.882,15.621) 71.882,35.083 ; 71.882,45.974 75.692,49.784 v1(80.01,49.784) ; v1(143.51,7.62) 143.51,-4.191 144.145,-4.826 R19.1
  Bottom Layer w0.3: 64.262,10.668 64.262,14.378
  Bottom Layer w0.5: 64.262,10.668 Pb.4 62.992,4.064 63.881,3.175 87.757,3.175 92.202,7.62 v1(143.51,7.62) ; 64.262,14.378 64.262,14.859 65.024,15.621 v1(71.882,15.621) ; v1(80.01,49.784) JP4.5
DAC2-OUT1: Pb.6 R23.1 | length 108.1
  Top Layer w0.5: v1(151.13,9.017) 151.13,-4.191 151.765,-4.826 R23.1
  Bottom Layer w0.5: Pb.6 65.532,4.953 66.294,4.191 86.741,4.191 91.567,9.017 v1(151.13,9.017)
EN: Pa.16
GND: C4.2 CE3.1 CE4.1 JP1.2 JP1.4 JP4.6 JP5.2 JP6.2 JP8.4 JP9.8 OP1.5 OP2.5 OP3.5 OP4.5 Pa.5 Pb.15 Pb.16 Pc.15 Pd.15 Q1.2 Q2.2 Q3.2 Q4.2 Q5.2 Q6.2 Q7.2 Q8.2 R44.2 R47.2 R50.2 R53.2 R56.2 R59.2 R62.2 R65.2 U2.3
I2C1-SCL: JP5.1 Pd.13 | length 21.6
  Top Layer w0.3: 64.262,38.1 64.262,41.81
  Top Layer w0.5: Pd.13 64.262,38.1 ; 64.262,41.81 JP5.1
I2C1-SDA: JP5.3 Pd.14 | length 20.2
  Top Layer w0.5: JP5.3 59.062,55.619 62.992,51.689 Pd.14
ISN: JP3b.1 R13.1 | length 20.4
  Top Layer w0.5: R13.1 171.323,37.846 171.831,37.338 184.531,37.338 185.039,37.846 JP3b.1
ISP: JP3b.3 R14.1 | length 9.3
  Top Layer w0.5: R14.1 JP3b.3
K-R-A: Pc.9
K-R-B: Pc.10
KEY3-R: Pc.11
KEY4: Pc.12
KEY5: Pc.13
KEY6: Pa.3
LCD-D4: Pa.8
LCD-D5: Pa.9
LCD-D6: Pa.10
LCD-D7: Pa.11
LED1: Pd.3
LED2: Pd.4
LED3: Pd.5
LED4: Pd.6
NetC1_2: C1.2 C3.2 CE1.2 CE2.2 D2.1 LED1.2 R1.2 R2.2 U1.3 | length 94.6
  Top Layer w0.5: v1(16.764,50.8) 16.764,56.261 v2(17.907,57.404)
  Top Layer w1: LED1.2 12.192,59.309 12.827,59.944 v2(15.367,59.944) ; D2.1 C1.2 ; C1.2@14.986,26.797 v1(21.59,26.797) 22.225,26.797 23.114,25.908 ; U1.3@21.717,45.465 U1.3@21.717,59.765 ; CE1.2 23.114,25.908 ; CE2.2 35.179,22.675 35.179,26.035 ; v1@38.481,26.797 35.941,26.797 35.179,26.035 ; 23.114,25.908 24.003,26.797 34.417,26.797 35.179,26.035
  Bottom Layer w0.5: C3.2@35.179,26.645 C3.2@35.192,26.657 ; C3.2@35.192,26.784 v1(38.468,26.784)
  Bottom Layer w1: v1(16.764,50.8) 16.764,48.895 17.145,48.514 R1.2 R2.2 20.447,42.799 21.59,41.656 v1(21.59,26.797)
  other v2: 15.367,57.404 20.447,57.404 22.987,57.404 25.527,57.404 28.067,57.404 17.907,59.944 20.447,59.944 22.987,59.944 25.527,59.944 28.067,59.944 15.367,62.484 17.907,62.484 20.447,62.484 22.987,62.484 25.527,62.484 28.067,62.484
NetC2_2: C2.2 R1.1 U1.5 | length 12.8
  Top Layer w1: U1.5 25.117,49.374 25.407,49.664 v1(25.407,52.324)
  Bottom Layer w1: R1.1 C2.2 v1(25.407,52.324)
NetC19_1: C19.1 CE12.1 R19.2 R20.2 R21.1 R22.2 | length 22.2
  Top Layer w0.5: CE12.1 147.291,6.731 148.746,5.276 R20.2 C19.1 R19.2 R22.2 R21.1
NetC20_1: C20.1 CE13.1 R23.2 R24.2 R25.1 R26.2 | length 22.2
  Top Layer w0.5: CE13.1 154.911,6.731 156.366,5.276 R24.2 C20.1 R23.2 R26.2 R25.1
NetC21_1: C21.1 CE14.1 R27.2 R28.2 R29.1 R30.2 | length 22.2
  Top Layer w0.5: CE14.1 162.56,6.731 164.015,5.276 R28.2 C21.1 R27.2 R30.2 R29.1
NetC22_1: C22.1 CE15.1 R31.2 R32.2 R33.1 R34.2 | length 22.2
  Top Layer w0.5: CE15.1 170.278,6.731 171.733,5.276 R32.2 C22.1 R31.2 R34.2 R33.1
NetC23_1: C23.1 CE16.1 R35.2 R36.2 R37.1 R38.2 | length 22.2
  Top Layer w0.5: CE16.1 178.025,6.731 179.48,5.276 R36.2 C23.1 R35.2 R38.2 R37.1
NetC24_1: C24.1 CE17.1 R39.2 R40.2 R41.1 R42.2 | length 22.2
  Top Layer w0.5: CE17.1 185.547,6.731 187.002,5.276 R40.2 C24.1 R39.2 R42.2 R41.1
NetCE4_2: CE4.2 L2.1 U2.5 | length 38.4
  Top Layer w1: U2.5 34.798,50.165 33.528,48.895 L2.1 33.528,41.021 34.163,40.386 56.007,40.386 56.567,40.946 CE4.2
NetCE5_1: CE5.1 U2.2 | length 8.3
  Top Layer w1: U2.2 44.831,58.039 47.656,60.864 CE5.1
NetCE5_2: CE5.2 U2.4 | length 7.9
  Top Layer w1: U2.4 45.339,52.959 47.244,54.864 CE5.2
NetD2_2: D2.2 L1.2 U1.2 | length 39.7
  Top Layer w1: L1.2 5.842,29.083 7.865,31.106 D2.2 v1(10.16,36.957) ; v1(12.065,47.879) 13.335,49.149 19.431,49.149 20.017,48.563 U1.2
  Bottom Layer w1: v1(10.16,36.957) 10.16,45.974 v1(12.065,47.879)
NetLED1_1: LED1.1 R4.2 | length 17.9
  Top Layer w1: v1(10.033,53.467) LED1.1 ; R4.2 v1(15.309,43.376)
  Bottom Layer w1: v1(10.033,53.467) 15.309,48.191 v1(15.309,43.376)
NetOP1_2: OP1.2 R70.2 | length 3.8
  Top Layer w0.5: R70.2 OP1.2@53.481,-7.507
NetOP2_2: OP2.2 R72.2 | length 3.8
  Top Layer w0.5: R72.2 OP2.2@62.371,-7.507
NetOP3_2: OP3.2 R74.2 | length 3.8
  Top Layer w0.5: R74.2 OP3.2@71.261,-7.507
NetOP4_2: OP4.2 R76.2 | length 3.8
  Top Layer w0.5: R76.2 OP4.2@80.151,-7.507
NetPOT1_1: POT1.1 R9.2 | length 12.4
  Top Layer w0.5: R9.2 134.493,28.067 135.255,28.829 POT1.1
NetPOT2_1: POT2.1 R11.2 | length 6.8
  Top Layer w0.5: R11.2@124.333,31.369 128.397,31.369 128.905,30.861 POT2.1
NetPOT2_2: POT2.2 R12.1 | length 4.9
  Top Layer w0.5: R12.1@124.333,24.638 126.365,24.638 127.254,23.749 POT2.2
NetPOT3_1: POT3.1 R15.2 | length 12.4
  Top Layer w0.5: R15.2 134.62,46.863 135.382,47.625 POT3.1
NetPOT4_1: POT4.1 R17.2 | length 6.8
  Top Layer w0.5: R17.2 128.524,50.165 129.032,49.657 POT4.1
NetPOT4_2: POT4.2 R18.1 | length 4.9
  Top Layer w0.5: R18.1 126.492,43.434 127.381,42.545 POT4.2
NetQ1_1: Q1.1 R43.2 R44.1 | length 9.2
  Top Layer w0.5: Q1.1 R44.1 R43.2
NetQ1_3: Q1.3 R45.1 | length 5.8
  Top Layer w0.5: Q1.3 25.466,-9.083 26.416,-10.033 R45.1
NetQ2_1: Q2.1 R46.2 R47.1 | length 9.2
  Top Layer w0.5: Q2.1 R47.1 R46.2
NetQ2_3: Q2.3 R48.1 | length 5.8
  Top Layer w0.5: Q2.3 12.004,-8.956 12.954,-9.906 R48.1
NetQ3_1: Q3.1 R49.2 R50.1 | length 9.2
  Top Layer w0.5: Q3.1 R50.1 R49.2
NetQ3_3: Q3.3 R51.1 | length 5.8
  Top Layer w0.5: Q3.3 18.735,-9.083 19.685,-10.033 R51.1
NetQ4_1: Q4.1 R52.2 R53.1 | length 9.2
  Top Layer w0.5: Q4.1 R53.1 R52.2
NetQ4_3: Q4.3 R54.1 | length 5.8
  Top Layer w0.5: Q4.3 32.197,-9.083 33.147,-10.033 R54.1
NetQ5_1: Q5.1 R55.2 R56.1 | length 9.2
  Top Layer w0.5: Q5.1 R56.1 R55.2
NetQ5_3: Q5.3 R57.1 | length 5.8
  Top Layer w0.5: Q5.3 38.928,-9.083 39.878,-10.033 R57.1
NetQ6_1: Q6.1 R58.2 R59.1 | length 9.2
  Top Layer w0.5: Q6.1 R59.1 R58.2
NetQ6_3: Q6.3 R60.1 | length 5.8
  Top Layer w0.5: Q6.3 45.659,-9.083 46.609,-10.033 R60.1
NetQ7_1: Q7.1 R61.2 R62.1 | length 9.4
  Top Layer w0.5: R61.2 R62.1 93.966,-12.431 93.966,-6.872 Q7.1
NetQ8_1: Q8.1 R64.2 R65.1 | length 9.3
  Top Layer w0.5: R64.2 R65.1 106.919,-12.432 106.919,-7 Q8.1
NetR2_1: R2.1 R3.2 U1.4 | length 16.5
  Top Layer w1: U1.4 23.417,42.75 23.749,42.418 24.384,42.418 25.019,41.783 ; R3.2 25.019,41.783 ; v1(28.067,44.704) 28.067,42.711 27.774,42.418 25.654,42.418 25.019,41.783
  Bottom Layer w1: R2.1 v1(28.067,44.704)
NetR10_2: R10.2 U5.6 | length 8.4
  Top Layer w0.5: R10.2 153.572,28.419 153.924,28.067 153.924,26.543 155.067,25.4 U5.6
NetR16_2: R16.2 U6.6 | length 8.3
  Top Layer w0.5: R16.2 153.699,47.215 154.051,46.863 154.051,45.466 155.321,44.196 U6.6
NREF: CE7.2 JP2.3 R6.1 R12.2 R18.2 U4.1 | length 80.4
  Top Layer w0.5: JP2.3 121.107,-16.434 121.92,-15.621 R6.1 U4.1 128.016,-12.319 128.651,-11.684 128.651,-2.794 127.889,-2.032 ; R18.2 121.891,40.484 121.031,39.624 121.031,22.86 121.949,21.942 R12.2 127.791,21.942 128.651,21.082 128.651,-1.27 127.889,-2.032 ; CE7.2 127.889,-2.032
NTC1: JP11.1 R67.1 R68.2 | length 12
  Top Layer w0.5: JP11.1 129.665,-16.893 131.133,-15.425 R68.2 R67.1
NTC2: JP11.4 R69.1 R78.2 | length 11.7
  Top Layer w0.5: R69.1 R78.2 140.843,-15.621 141.605,-16.383 JP11.4
OP1A: JP7.1 R70.1 | length 9.4
  Top Layer w0.5: JP7.1 54.944,-16.684 56.431,-15.197 R70.1
OP1K: JP7.2 OP1.1 | length 14.5
  Top Layer w0.5: OP1.1 57.15,-7.493 58.924,-9.267 JP7.2
OP2A: JP7.3 R72.1 | length 9.7
  Top Layer w0.5: JP7.3 62.904,-16.852 65.321,-14.435 R72.1
OP2K: JP7.4 OP2.1 | length 14.1
  Top Layer w0.5: OP2.1 66.04,-7.493 66.884,-8.337 JP7.4
OP3A: JP7.5 R74.1 | length 10.1
  Top Layer w0.5: JP7.5 70.864,-17.528 74.211,-14.181 R74.1
OP3K: JP7.6 OP3.1 | length 14.6
  Top Layer w0.5: OP3.1 75.184,-7.493 75.819,-8.128 75.819,-16.51 74.844,-17.485 JP7.6
OP4A: JP7.7 R76.1 | length 12
  Top Layer w0.5: JP7.7 78.824,-15.283 79.672,-14.435 82.212,-14.435 83.101,-13.546 R76.1
OP4K: JP7.8 OP4.1 | length 14.9
  Top Layer w0.5: OP4.1 83.947,-7.493 84.709,-8.255 84.709,-14.732 82.804,-16.637 JP7.8
PA15: Pd.2 R55.1 | length 75.3
  Top Layer w0.3: 76.962,34.29 76.962,38
  Top Layer w0.5: R55.1 v1(36.928,12.573) ; v1(52.959,12.573) v1(52.959,24.638) ; v1(76.962,24.638) 76.962,34.29 ; 76.962,38 Pd.2@78.232,39.27
  Bottom Layer w0.5: v1(36.928,12.573) v1(52.959,12.573) ; v1(52.959,24.638) v1(76.962,24.638)
PB3: Pd.7 R58.1 | length 59.1
  Top Layer w0.5: R58.1 43.674,4.558 43.674,13.956 v1(43.688,13.97) ; v1(51.689,14.097) v1(51.689,26.416) ; v1(70.612,26.416) Pd.7
  Bottom Layer w0.5: v1(43.688,13.97) 43.752,14.034 51.626,14.034 v1(51.689,14.097) ; v1(51.689,26.416) v1(70.612,26.416)
PB12: OP3.4 Pc.1 R75.1 | length 31.1
  Top Layer w0.5: R75.1 OP3.4 68.707,3.81 69.723,4.826 80.518,4.826 81.534,5.842 Pc.1
PB13: OP4.4 Pc.2 R77.1 | length 24.9
  Top Layer w0.5: R77.1 OP4.4 77.597,2.286 78.359,3.048 83.058,3.048 84.074,4.064 Pc.2
PB14: Pc.3 Q7.3 R63.2 | length 37.4
  Top Layer w0.3: 82.804,17.018 85.979,17.018
  Top Layer w0.5: Pc.3 82.804,17.018 ; 85.979,17.018 86.868,16.129 86.868,0.254 88.519,-1.397 88.519,-3.732 90.184,-5.397 ; R63.2@90.184,-8.622 90.184,-5.397 ; Q7.3@94.894,-4.508 91.073,-4.508 90.184,-5.397
PB15: Pc.4 Q8.3 R66.2 | length 51.8
  Top Layer w0.5: R66.2 103.174,-5.524 104.063,-4.635 ; v1(103.251,19.05) 103.251,-3.823 104.063,-4.635 ; Q8.3 104.063,-4.635
  Bottom Layer w0.5: Pc.4 86.36,18.288 87.122,19.05 v1(103.251,19.05)
PC6: Pc.5 R43.1 | length 74.4
  Top Layer w0.5: R43.1 v1(23.466,8.636) ; v1(57.15,8.636) v1(57.15,20.828)
  Bottom Layer w0.5: v1(23.466,8.636) v1(57.15,8.636) ; v1(57.15,20.828) Pc.5
PC7: Pc.6 R46.1 | length 89.5
  Top Layer w0.5: R46.1 v1(10.004,7.239) ; v1(58.42,7.239) v1(58.42,19.558)
  Bottom Layer w0.3: 79.094,19.558 82.804,19.558
  Bottom Layer w0.5: v1(10.004,7.239) v1(58.42,7.239) ; v1(58.42,19.558) 79.094,19.558 ; 82.804,19.558 Pc.6
PC8: Pc.7 R49.1 | length 83.6
  Top Layer w0.5: R49.1 v1(16.735,11.176) ; v1(54.356,11.176) v1(54.356,23.368)
  Bottom Layer w0.5: v1(16.735,11.176) v1(54.356,11.176) ; v1(54.356,23.368) Pc.7
PC9: Pc.8 R52.1 | length 72
  Top Layer w0.5: R52.1 v1(30.197,9.906) ; v1(55.753,9.906) v1(55.753,22.098)
  Bottom Layer w0.3: 78.994,22.098 82.704,22.098
  Bottom Layer w0.5: v1(30.197,9.906) v1(55.753,9.906) ; v1(55.753,22.098) 78.994,22.098 ; 82.704,22.098 83.974,23.368 Pc.8
PREF: CE6.1 JP2.1 R5.1 R11.1 R17.1 R22.1 R26.1 R30.1 R34.1 R38.1 R42.1 R68.1 R78.1 U3.2 | length 177.3
  Top Layer w0.5: JP2.1 113.147,-17.536 113.792,-16.891 R5.1 115.443,-9.398 115.824,-9.779 U3.2 ; CE6.1 118.754,5.978 ; v1(119.761,-3.429) 119.761,4.971 118.754,5.978 ; v1(122.555,28.448) 124.362,28.448 R11.1 ; R17.1 120.748,47.215 119.761,46.228 v1(119.761,28.448) 119.761,6.985 118.754,5.978 ; R68.1 v1(135.988,-12.446) R78.1 ; v1(143.735,-8.636) R22.1 ; v1(151.355,-8.636) R26.1 ; v1(159.004,-8.636) R30.1 ; v1(166.722,-8.636) R34.1 ; v1(174.469,-8.636) R38.1 ; v1(181.991,-8.636) R42.1
  Bottom Layer w0.5: U3.2 121.412,-9.779 ; v1(119.761,-3.429) 121.627,-3.429 121.92,-3.722 121.92,-9.271 121.412,-9.779 ; v1(119.761,28.448) v1(122.555,28.448) ; v1(181.991,-8.636) v1(174.469,-8.636) v1(166.722,-8.636) v1(159.004,-8.636) v1(151.355,-8.636) v1(143.735,-8.636) 136.525,-8.636 135.988,-9.173 v1(135.988,-12.446) 135.988,-14.761 135.509,-15.24 122.428,-15.24 121.92,-14.732 121.92,-10.287 121.412,-9.779
Q1B: JP8.2 R61.1 | length 15.6
  Top Layer w0.5: R61.1 87.191,-15.309 87.63,-15.748 95.123,-15.748 95.928,-16.553 JP8.2
Q1C: JP9.2 R48.2 | length 13.6
  Top Layer w0.5: R48.2 10.004,-15.465 11.049,-16.51 16.129,-16.51 17.014,-17.395 JP9.2
Q2B: JP8.3 R64.1 | length 7.7
  Top Layer w0.5: JP8.3 99.908,-16.551 100.145,-16.314 R64.1
Q2C: JP9.3 R51.2 | length 10.7
  Top Layer w0.5: R51.2 16.735,-14.068 18.034,-15.367 20.32,-15.367 20.994,-16.041 JP9.3
Q3C: JP9.4 R45.2 | length 8.2
  Top Layer w0.5: R45.2 23.466,-15.211 24.974,-16.719 JP9.4
Q4C: JP9.5 R54.2 | length 8.1
  Top Layer w0.5: JP9.5 28.954,-16.385 30.197,-15.142 R54.2
Q5C: JP9.6 R57.2 | length 10.3
  Top Layer w0.5: JP9.6 32.934,-16.596 33.909,-15.621 35.687,-15.621 36.928,-14.38 R57.2
Q6C: JP9.7 R60.2 | length 13.5
  Top Layer w0.5: JP9.7 36.914,-17.569 37.719,-16.764 43.053,-16.764 43.659,-16.158 R60.2
REFa: C11.1 POT2.3 U5.5 | length 39.3
  Top Layer w0.5: C11.1 153.289,24.511 154.94,22.86 U5.5
  Bottom Layer w0.5: POT2.3 133.233,26.279 138.303,21.209 141.732,21.209 144.907,24.384 150.749,24.384 152.273,22.86 U5.5
REFb: C18.1 POT4.3 U6.5 | length 39.3
  Top Layer w0.5: C18.1 153.416,43.307 155.067,41.656 U6.5
  Bottom Layer w0.5: POT4.3 133.36,45.075 138.43,40.005 141.859,40.005 145.034,43.18 151.257,43.18 152.781,41.656 U6.5
RG1a: R9.1 U5.1 | length 34.6
  Bottom Layer w0.5: R9.1 134.493,32.766 135.255,33.528 163.83,33.528 164.846,32.512 U5.1
RG1b: R15.1 U6.1 | length 36
  Bottom Layer w0.5: R15.1 134.62,52.07 135.382,52.832 164.465,52.832 164.973,52.324 U6.1
RG2a: POT1.2 POT1.3 U5.8 | length 21.9
  Top Layer w0.5: POT1.2 POT1.3
  Bottom Layer w0.5: POT1.3 150.124,26.299 154.305,30.48 U5.8
RG2b: POT3.2 POT3.3 U6.8 | length 21.9
  Top Layer w0.5: POT3.2 POT3.3
  Bottom Layer w0.5: POT3.3 150.251,45.095 154.432,49.276 U6.8
RS: Pb.7
SD-CLK: JP4.4 Pb.5 | length 61.4
  Top Layer w0.3: 74.422,35.141 74.422,45.974
  Top Layer w0.5: v1(74.422,14.351) 74.422,35.141 ; 74.422,45.974 76.581,48.133 v1(82.61,48.133)
  Bottom Layer w0.5: Pb.5 65.532,13.716 66.167,14.351 v1(74.422,14.351) ; v1(82.61,48.133) JP4.4
SD-DI: JP4.3 Pd.9 | length 34.1
  Top Layer w0.3: 69.342,38.1 69.342,41.81
  Top Layer w0.5: Pd.9 69.342,38.1 ; 69.342,41.81 69.342,48.641 73.787,53.086 83.82,53.086 85.21,54.476 JP4.3
SD-DO: JP4.2 Pd.8 | length 32.1
  Top Layer w0.5: Pd.8 70.612,47.244 74.803,51.435 85.725,51.435 87.81,53.52 JP4.2
SWCLK: Pd.1
SWDIO: Pc.14
USART1-RX: JP6.3 Pd.11 | length 22.2
  Top Layer w0.3: 66.802,38.1 66.802,41.81
  Top Layer w0.5: Pd.11 66.802,38.1 ; 66.802,41.81 66.802,51.689 68.282,53.169 JP6.3
USART1-TX: JP6.1 Pd.10 | length 20.8
  Top Layer w0.5: Pd.10 68.072,50.165 73.482,55.575 JP6.1
V_BAT: Pa.1
VDDA: Pa.13
VSN: JP3a.1 R7.1 | length 20.4
  Top Layer w0.5: R7.1@171.323,21.326 171.323,19.294 171.831,18.786 184.531,18.786 185.039,19.294 JP3a.1
VSP: JP3a.3 R8.1 | length 9.3
  Top Layer w0.5: R8.1@175.768,31.445 JP3a.3
pads on no net: M1.1 M2.1 M3.1 M4.1 M5.1 M6.1 M7.1 OP1.3 OP1.6 OP2.3 OP2.6 OP3.3 OP3.6 OP4.3 OP4.6 Pa.7 Pd.12 U2.1 U2.6 U2.7 U3.3 U4.3

## Polygon pours and split planes (outlines as drawn)
AGND on Bottom Layer "NONET_L-01_P-001" (solid, shelved, pour order 5): 101.422,63.218 190.373,63.218 190.373,-25.428 111.633,-25.428 111.633,-0.409 101.337,-0.409
GND on Bottom Layer "NONET_L-01_P-001" (solid, shelved, pour order 0): -1.651,63.246 99.822,63.246 99.822,-1.524 110.744,-1.524 110.744,-25.4 -1.651,-25.4
AGND on Top Layer "NONET_L-01_P-001" (solid, shelved, pour order 3): 101.304,63.246 190.373,63.246 190.373,-25.4 111.633,-25.4 111.633,-0.381 101.219,-0.381
GND on Top Layer "NONET_L-01_P-001" (solid, shelved, pour order 2): -1.651,63.246 99.822,63.246 99.822,-1.524 110.744,-1.524 110.744,-25.4 -1.651,-25.4

## Other copper
Top Layer:
  rectangle net NetC1_2: 13.718,54.864 29.718,63.864
  pour cut-out: -1.623,-25.936 6.632,-25.936 6.632,-17.681 -1.623,-17.681
  pour cut-out: 183.035,-26.063 191.29,-26.063 191.29,-17.808 183.035,-17.808
  pour cut-out: 182.781,54.963 191.036,54.963 191.036,63.218 182.781,63.218
  pour cut-out: -1.651,-1.509 6.604,-1.509 6.604,6.746 -1.651,6.746
  pour cut-out: 93.049,-1.509 101.304,-1.509 101.304,6.746 93.049,6.746
  pour cut-out: 93.049,54.991 101.304,54.991 101.304,63.246 93.049,63.246
  pour cut-out: -1.651,54.991 6.604,54.991 6.604,63.246 -1.651,63.246
Bottom Layer:
  rectangle net NetC1_2: 13.718,54.864 29.718,63.864
  pour cut-out: -1.623,-17.681 -1.623,-25.936 6.632,-25.936 6.632,-17.681
  pour cut-out: 183.035,-17.808 183.035,-26.063 191.29,-26.063 191.29,-17.808
  pour cut-out: 182.781,63.218 182.781,54.963 191.036,54.963 191.036,63.218
  pour cut-out: -1.651,6.746 -1.651,-1.509 6.604,-1.509 6.604,6.746
  pour cut-out: 93.049,6.746 93.049,-1.509 101.304,-1.509 101.304,6.746
  pour cut-out: 93.049,63.246 93.049,54.991 101.304,54.991 101.304,63.246
  pour cut-out: -1.651,63.246 -1.651,54.991 6.604,54.991 6.604,63.246

## Silkscreen, mask and mechanical layers (free items; w line width, h text height)
Top Overlay:
  lines w0.1: 0,0 99.822,0 99.822,61.595 0,61.595 0,0
  text "AuxBoard030610" at 121.285,61.214 h1.3
  text "www.nekoorad.com" at 119.553,59.228 h1.5
  text "09191143937" at 121.839,57.069 h1.5
Bottom Overlay:
  text "PA4-CS" at 80.826,56.188 h1 r90
  text "PA5-CLK" at 83.366,56.188 h1 r90
  text "PB5-DI" at 86.033,56.188 h1 r90
  text "PB4-DO" at 88.7,56.188 h1 r90
  text "GND" at 78.159,56.061 h1 r90
  text "PB6-Tx" at 74.318,56.002 h1.3 r90
  text "PB9-SDA" at 59.771,55.961 h1.3 r90
  text "PB8-SCL" at 64.978,55.961 h1.3 r90
  text "PB7-Rx" at 69.042,55.961 h1.3 r90
  text "3V3" at 91.267,55.961 h1.3 r90
  text "USART" at 71.582,53.675 h1.3 r90
  text "I2C" at 62.819,52.243 h1.3
  text "PB2" at 182.072,51.989 h1.3
  text "ISP" at 182.199,50.754 h1.3 r90
  text "12V" at 7.32,49.103 h1.3 r90
  text "SPI" at 78.948,48.433 h1.3
  text "GND" at 8.717,43.48 h1.3
  text "ISN" at 181.945,43.388 h1.3 r90
  text "12V" at 7.193,41.229 h1.3 r90
  text "GND" at 8.717,35.733 h1.3
  text "PC5" at 182.199,34.209 h1.3
  text "5V" at 7.193,33.101 h1.3 r90
  text "VSP" at 182.326,33.101 h1.3 r90
  text "VSN" at 182.199,24.973 h1.3 r90
  text "OUTPUT" at 31.831,-12.019 h1.2
  text "ISO INPUT" at 71.963,-12.527 h1.3
  text "AGND" at 178.389,-13 h1.3 r90
  text "ANALOG" at 168.991,-13.162 h1.3
  text "INPUT" at 100.284,-13.289 h1.3
  text "PC7" at 17.48,-13.381 h1.3 r90
  text "PC8" at 21.544,-13.381 h1.3 r90
  text "PC6" at 25.481,-13.381 h1.3 r90
  text "PC9" at 29.672,-13.381 h1.3 r90
  text "PA15" at 33.609,-13.381 h1.3 r90
  text "PB3" at 37.546,-13.381 h1.3 r90
  text "GND" at 41.61,-13.508 h1.3 r90
  text "PB14" at 96.601,-13.635 h1.3 r90
  text "PB15" at 100.538,-13.635 h1.3 r90
  text "PA4" at 154.513,-13.635 h1.3 r90
  text "PA6" at 158.577,-13.635 h1.3 r90
  text "PA0" at 162.514,-13.635 h1.3 r90
  text "PA1" at 166.705,-13.635 h1.3 r90
  text "PB0" at 170.642,-13.635 h1.3 r90
  text "PC4" at 174.706,-13.635 h1.3 r90
  text "5V" at 150.703,-14.016 h1.3 r90
  text "5V" at 13.797,-14.524 h1.3 r90
  text "GND" at 104.729,-14.651 h1.3 r90
  text "NTC" at 137.749,-15.194 h1.3
  text "5V" at 92.664,-15.54 h1.3 r90
  text "PC15" at 59.136,-15.702 h1.3
  text "PB13" at 82.885,-15.702 h1.3
  text "PB11" at 67.01,-15.829 h1.3
  text "PB12" at 75.011,-15.829 h1.3
  text "PA3" at 130.891,-17.607 h1.3
  text "AGND" at 138.13,-17.607 h1.3
  text "PB1" at 142.448,-17.607 h1.3
  text "A" at 55.58,-17.734 h1.3
  text "K" at 59.39,-17.734 h1.3
  text "A" at 79.329,-17.734 h1.3
  text "K" at 83.139,-17.734 h1.3
  text "PREF" at 113.873,-17.734 h1.3
  text "AGND" at 119.461,-17.734 h1.3
  text "NREF" at 124.795,-17.734 h1.3
  text "A" at 63.454,-17.861 h1.3
  text "K" at 67.264,-17.861 h1.3
  text "A" at 71.455,-17.861 h1.3
  text "K" at 75.265,-17.861 h1.3
Mechanical 1:
  the board outline again, w0.254

## Text inside footprints (layer, text, board x,y; h text height)
Pa: Top Overlay "16" at 42.418,14.859 h1.3; Top Overlay "15" at 50.8,14.859 h1.3; Top Overlay "1" at 48.641,35.687 h1.3; Top Overlay "2" at 45.466,35.433 h1.3
Pb: Top Overlay "17" at 56.769,11.811 h1.3; Top Overlay "18" at 56.769,9.652 h1.3; Top Overlay "32" at 80.137,9.398 h1.3; Top Overlay "31" at 79.883,11.684 h1.3
Pc: Top Overlay "48" at 83.312,35.306 h1.2; Top Overlay "47" at 80.645,35.306 h1.2; Top Overlay "34" at 85.979,14.986 h1.3; Top Overlay "33" at 77.724,14.986 h1.3
Pd: Top Overlay "50" at 80.137,39.243 h1.2; Top Overlay "49" at 80.137,37.338 h1.2; Top Overlay "63" at 56.642,36.068 h1.3; Top Overlay "64" at 56.642,38.862 h1.3
U3: Bottom Overlay "+" at 119.634,-9.525 h1 r90; Bottom Overlay "T" at 119.634,-6.858 h1 r90; Bottom Overlay "-" at 119.634,-12.065 h1 r90
U4: Bottom Overlay "+" at 127.762,-9.525 h1 r90; Bottom Overlay "T" at 127.762,-6.858 h1 r90; Bottom Overlay "-" at 127.762,-12.065 h1 r90